# EAGLE board FTDI_breakout (EAGLE 5.11)
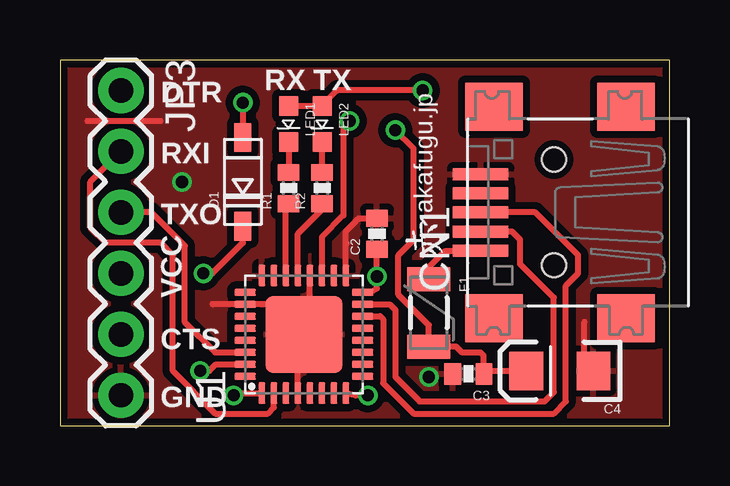
[diagram p0: board, top side]
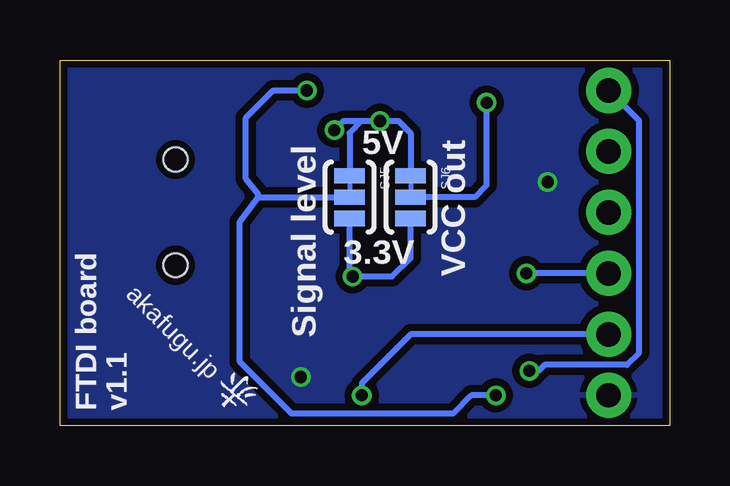
[diagram p1: board, bottom side, seen from below]

Size 25.4 x 15.24 mm. Coordinates in mm from the lower left corner, seen from the top.
Outline: 0,0 25.4,0 25.4,15.24 0,15.24 0,0
Copper layers (1*16): Top 0.035mm / dielectric 1.5mm / Bottom 0.035mm
Design rules "Akafugu *": minimum track width 10mil, minimum drill 12mil, track to track 8mil, track to pad 8mil, pad to pad 7mil, via to via 8mil, smd to smd 0mil, copper to edge 12mil, drill to drill 10mil, minimum pad ring 12mil, minimum via ring 6mil, stop-mask expansion 2mil, vias tented up to drill 45mil, thermal gap 10mil

## Footprints (pad centres in the part's own frame; a part is rotated, then mirrored left to right if it is on the bottom)
0402-CAP = smd 0.7 x 0.9: 1 -0.65,0; 2 0.65,0
EIA3216 = smd 1.4 x 1.6: A 1.4,0; C -1.4,0
USB-MINIB = smd 0.5 x 2.308: D+ 0,4.064; D- -0.8,4.064; GND 1.6,4.064; ID 0.8,4.064; VBUS -1.6,4.064 | smd 2 x 2.4: GND1 -4.4,-2; GND2 -4.4,3.5; GND3 4.4,3.5; GND4 4.4,-2 | hole 1: -2.2,1; 2.2,1
SOD-123 = smd 1.2 x 0.7: A 1.85,0; C -1.85,0
PTC-1206 = smd 1 x 1.8: 1 -1.4,0; 2 1.4,0
1X06 = drill 1.016 pad 1.88 round: 1 0,0; 2 2.54,0; 3 5.08,0; 4 7.62,0; 5 10.16,0; 6 12.7,0
LED-0603 = smd 0.8 x 0.8: A -0.75,0; C 0.75,0
R0402 = smd 0.7 x 0.9: 1 -0.65,0; 2 0.65,0
SJ-3-LEFT = smd 0.635 x 1.27: 1 -0.889,0; 2 0,0; 3 0.889,0
QFN32-LONG = smd 0.9 x 0.3: 1 -2.45,1.75; 2 -2.45,1.25; 3 -2.45,0.75; 4 -2.45,0.25; 5 -2.45,-0.25; 6 -2.45,-0.75; 7 -2.45,-1.25; 8 -2.45,-1.75; 17 2.45,-1.75; 18 2.45,-1.25; 19 2.45,-0.75; 20 2.45,-0.25; 21 2.45,0.25; 22 2.45,0.75; 23 2.45,1.25; 24 2.45,1.75 | smd 0.3 x 0.9: 9 -1.75,-2.45; 10 -1.25,-2.45; 11 -0.75,-2.45; 12 -0.25,-2.45; 13 0.25,-2.45; 14 0.75,-2.45; 15 1.25,-2.45; 16 1.75,-2.45; 25 1.75,2.45; 26 1.25,2.45; 27 0.75,2.45; 28 0.25,2.45; 29 -0.25,2.45; 30 -0.75,2.45; 31 -1.25,2.45; 32 -1.75,2.45 | smd 3.2 x 3.2: EXP 0,0

## Placement (x,y rotation side)
C2  0.1uF  [0402-CAP]  13.21,8 90 top
C3  0.1uF  [0402-CAP]  17.02,2.16 180 top
C4  10uF  [EIA3216]  20.83,2.29 180 top
CN1  [USB-MINIB]  21.59,8.89 90 top
D1  [SOD-123]  7.62,10.16 90 top
F1  PTCSMD  [PTC-1206]  15.37,4.7 270 top
JP3  [1X06]  2.54,13.97 270 top
LED1  Red  [LED-0603]  9.53,12.57 270 top
LED2  Green  [LED-0603]  10.92,12.57 270 top
R1  [R0402]  9.53,9.91 90 top
R2  [R0402]  10.92,9.91 90 top
SJ5  [SJ-3-LEFT]  13.34,9.53 270 bottom
SJ6  [SJ-3-LEFT]  10.79,9.53 270 bottom
U1  FT232R-BASIC-PAD-Q-LONGPADS  [QFN32-LONG]  10.16,3.81 90 top
U$5  LOGO-3-SMALL-URL  [LOGO-MICRO-URL]  16.84,1.52 135 bottom
U$6  LOGO-3-BIG-URL  [LOGO-MICRO-URL]  16.16,6.95 90 top

## Library data of the parts
C2-C4 CN1 D1 F1 LED1 LED2 R1 R2 SJ5 SJ6 U1 U$5 U$6 = akafugu
JP3 = SparkFun; EAGLEUP: 1X06-ANGLE-FEMALE

## Nets
3.3V: C2.1 SJ5.3 SJ6.3 U1.16
5V: C3.1 C4.A F1.2 SJ5.1 SJ6.1 U1.19
CTS: JP3.5 U1.8
DTR: JP3.1 U1.31
GND: C2.2 C3.2 C4.C CN1.GND JP3.6 U1.4 U1.17 U1.20 U1.24 U1.26 U1.EXP
N$1: CN1.D+ U1.14
N$2: CN1.D- U1.15
N$3: LED1.C R1.2
N$4: LED2.C R2.2
N$5: CN1.VBUS F1.1
N$6: D1.A SJ6.2
N$12: R1.1 U1.22
N$13: R2.1 U1.21
RX-I: JP3.2 U1.2
TX-O: JP3.3 U1.30
VCCIO: LED1.A LED2.A SJ5.2 U1.1
VCCOUT: D1.C JP3.4

## Tracks (layer width: path | path; a pad name or v marks a point on that pad's centre or on a via)
3.3V  (via drill 0.51)
  Top 0.254: U1.16 12.93,5.56 13.21,5.71 v13.21,6.22 C2.1
  Bottom 0.254: SJ5.3 13.34,6.35 v13.21,6.22 11.56,6.22 10.79,6.99 SJ6.3
5V  (via drill 0.51)
  Top 0.254: F1.2 16,3.3 16.51,3.3 16.76,3.05 17.53,3.05 17.65,2.92 17.65,2.16 C3.1 17.77,2.17 17.91,2.29 C4.A | U1.19 10.91,7.86 11.81,8.76 11.81,12.45 v12.06,12.7 | F1.2 | F1.2 15.37,4.19 14.1,5.46 14.1,7.11 14.73,7.75 14.73,11.56 v13.97,12.32 | F1.2
  Bottom 0.254: v13.97,12.32 13.59,12.7 12.83,12.7 | 12.83,12.7 v12.06,12.7 11.3,12.7 10.79,12.19 SJ6.1 | 12.83,12.7 13.34,12.19 SJ5.1
CTS  (via drill 0.51)
  Top 0.254: U1.8 12.16,1.3 12.32,1.27 v12.83,1.27
  Bottom 0.254: v12.83,1.27 12.83,1.78 10.79,3.81 JP3.5
DTR  (via drill 0.51)
  Top 0.254: v5.84,2.29 6.22,2.29 6.5,2.56 U1.31
  Bottom 0.254: v5.84,2.29 5.46,2.29 5.21,2.54 1.78,2.54 1.27,3.05 1.27,12.7 JP3.1
GND  (via drill 0.51)
  Top 0.254: U1.20 10.41,4.06 U1.EXP | U1.EXP 10.16,2.67 9.91,2.41 U1.4 | U1.17 11.91,7.62 | 11.91,7.62 11.91,8.1 12.45,8.64 13.07,8.64 C2.2 | U1.EXP 8.91,5.06 U1.26 6.37,5.06 6.35,5.08 | 1.14,12.7 4.19,12.7 | 21.84,4.32 21.84,2.67 21.97,2.67 C4.C | 11.91,7.62 11.94,7.59
  other vias: 15.37,2.03 5.08,10.16
  pour Bottom (isolate 0.305): -1.27,17.78 29.21,17.78 29.21,-1.27 -1.27,-1.27
  pour Top (isolate 0.305): -2.54,19.05 30.48,19.05 30.48,-2.54 -2.54,-2.54
N$1
  Top 0.254: CN1.D+ 19.81,8.89 21.59,7.11 21.59,6.35 21.08,5.84 21.08,1.02 20.57,0.51 14.73,0.51 13.46,1.78 13.46,4.45 13.34,4.57 12.62,4.57 U1.14
N$2
  Top 0.254: CN1.D- 18.83,8.09 19.18,7.75 19.18,6.73 20.57,5.33 20.57,1.4 20.19,1.02 14.99,1.02 13.97,2.03 13.97,4.83 13.74,5.06 U1.15
N$3
  Top 0.254: LED1.C R1.2
N$4
  Top 0.254: R2.2 LED2.C
N$5
  Top 0.254: CN1.VBUS 16.05,7.29 15.37,6.6 F1.1
N$6  (via drill 0.51)
  Top 0.254: v7.62,13.46 D1.A
  Bottom 0.254: v7.62,13.46 7.62,10.03 8.13,9.53 SJ6.2
N$12
  Top 0.254: U1.22 9.41,9.16 9.53,9.27 R1.1
N$13
  Top 0.254: U1.21 9.91,8.01 10.92,9.02 R2.1
RX-I
  Top 0.254: JP3.2 1.27,10.16 1.27,8.26 1.91,7.62 4.19,7.62 4.7,7.11 4.7,2.29 6.48,0.51 8.66,0.51 8.91,0.76 8.91,1.33 U1.2
TX-O
  Top 0.254: U1.30 6.46,3.06 5.21,4.32 5.21,7.49 3.81,8.89 JP3.3
VCCIO  (via drill 0.51)
  Top 0.254: LED1.A LED2.A 10.92,13.34 11.56,13.97 v15.11,13.97 | U1.1 7.33,1.36 v7.24,1.27
  Bottom 0.254: v15.11,13.97 16.51,13.97 17.65,12.83 17.65,10.29 17.14,9.65 17.14,9.53 | v7.24,1.27 8.26,1.27 9.02,0.51 15.75,0.51 17.91,2.67 17.91,8.51 17.14,9.53 | 17.14,9.53 SJ5.2
VCCOUT  (via drill 0.51)
  Top 0.254: D1.C 7.62,7.62 6.35,6.35 v5.97,6.35
  Bottom 0.254: JP3.4 v5.97,6.35

## Text on the board
tPlace: RX | TX | DTR | RXI | TXO | VCC | CTS | GND
bPlace: 5V | 3.3V | VCC out | Signal level | v1.1 | FTDI board